# EAGLE board analog-v10 (EAGLE 7.2.0)

Size 140 x 89.87 mm. Coordinates in mm from the lower left corner, seen from the top.
Outline: 30,0 110,0 arc90 120,10 120,20 arc-90 122,22 140,22 140,28 122,28 arc-90 120,30 120,40 arc90 110,50 80,50 arc-90 75,55 75,75 arc-90 80,80 98,80 98,89.87 42,89.87 42,80 60,80 arc-90 65,75 65,55 arc-90 60,50 30,50 arc90 20,40 20,30 arc-90 18,28 0,28 0,22 18,22 arc-90 20,20 20,10 arc90 30,0
Copper layers (1*16): Top 0.035mm / dielectric 1.5mm / Bottom 0.035mm
Design rules "default": minimum track width 10mil, minimum drill 24mil, track to track 8mil, track to pad 8mil, pad to pad 8mil, via to via 8mil, smd to smd 8mil, copper to edge 40mil, drill to drill 8mil, minimum pad ring 10mil, minimum via ring 8mil, stop-mask expansion 4mil, vias tented up to drill 0mil, thermal gap 10mil
Holes 2.2 mm at 26,34 26,16 114,16 114,34

## Footprints (pad centres in the part's own frame; a part is rotated, then mirrored left to right if it is on the bottom)
1X03_LOCK = drill 1.016 pad 1.88: 1 0,0.127; 2 2.54,-0.127; 3 5.08,0.127
JST-2-PTH = drill 0.7 pad 1.448: 1 -1,0; 2 1,0
0603-CAP = smd 1.1 x 1: 1 -0.85,0; 2 0.85,0
EIA3528 = smd 1.2 x 2.5: A 1.65,0; C -1.65,0
LED-0603 = smd 1 x 1: A 0,-0.877; C 0,0.877
SOT223 = smd 1.499 x 2.007: 1 -2.261,-3.15; 2 0.025,-3.15; 3 2.311,-3.15 | smd 3.81 x 2.007: 4 0,3.15
1X06_LOCK = drill 1.016 pad 1.88: 1 0,0; 2 2.54,-0.254; 3 5.08,0; 4 7.62,-0.254; 5 10.16,0; 6 12.7,-0.254
SOT223' = smd 1.219 x 2.235: 1 -2.311,-3.099; 2 0,-3.099; 3 2.311,-3.099 | smd 3.6 x 2.2: 4 0,3.099
0603-RES = smd 1.1 x 1: 1 -0.85,0; 2 0.85,0
TACTILE-SWITCH-1101NE = smd 2.3 x 1.6: P$1 -3.15,0; P$2 3.15,0
TQFP32-08 = smd 1.27 x 0.559: 1 -4.293,2.8; 2 -4.293,2; 3 -4.293,1.2; 4 -4.293,0.4; 5 -4.293,-0.4; 6 -4.293,-1.2; 7 -4.293,-2; 8 -4.293,-2.8; 17 4.293,-2.8; 18 4.293,-2; 19 4.293,-1.2; 20 4.293,-0.4; 21 4.293,0.4; 22 4.293,1.2; 23 4.293,2; 24 4.293,2.8 | smd 0.559 x 1.27: 9 -2.8,-4.293; 10 -2,-4.293; 11 -1.2,-4.293; 12 -0.4,-4.293; 13 0.4,-4.293; 14 1.2,-4.293; 15 2,-4.293; 16 2.8,-4.293; 25 2.8,4.293; 26 2,4.293; 27 1.2,4.293; 28 0.4,4.293; 29 -0.4,4.293; 30 -1.2,4.293; 31 -2,4.293; 32 -2.8,4.293
SSOP24 = smd 0.348 x 1.397: 1 -3.575,-3.656; 2 -2.925,-3.656; 3 -2.275,-3.656; 4 -1.625,-3.656; 5 -0.975,-3.656; 6 -0.325,-3.656; 7 0.325,-3.656; 8 0.975,-3.656; 9 1.625,-3.656; 10 2.275,-3.656; 11 2.925,-3.656; 12 3.575,-3.656; 13 3.575,3.656; 14 2.925,3.656; 15 2.275,3.656; 16 1.625,3.656; 17 0.975,3.656; 18 0.325,3.656; 19 -0.325,3.656; 20 -0.975,3.656; 21 -1.625,3.656; 22 -2.275,3.656; 23 -2.925,3.656; 24 -3.575,3.656
QRE1113 = smd 1.2 x 0.6: 1 -1.8,-0.9; 2 1.8,-0.9; 3 1.8,0.9; 4 -1.8,0.9
RESONATOR-SMD = smd 0.45 x 1.905: 1 -1.2,0; 2 0,0; 3 1.2,0

## Placement (x,y rotation side)
9VREG  [1X03_LOCK]  35.24,45.72 270 top
BAT  M02JST-PTH-2  [JST-2-PTH]  84.77,41.91 0 bottom
C1  0.1uF  [0603-CAP]  80.96,20.32 270 top
C2  0.1uF  [0603-CAP]  69.53,66.04 0 bottom
C3  0.1uF  [0603-CAP]  106.36,44.45 0 top
C4  0.1uF  [0603-CAP]  64.45,10.16 90 top
C5  0.1uF  [0603-CAP]  64.45,6.35 90 top
C6  10uF  [EIA3528]  77.15,8.89 90 top
C8  0.1uF  [0603-CAP]  106.36,46.99 0 top
C9  0.1uF  [0603-CAP]  69.53,73.66 0 bottom
C10  1.0uF  [0603-CAP]  69.53,71.12 0 bottom
C11  47uF  [EIA3528]  102.55,45.72 90 top
C12  47uF  [EIA3528]  96.2,36.83 0 top
D1  STATE  [LED-0603]  100.01,5.08 90 top
IC1  REG1117  [SOT223]  96.2,44.45 0 top
JP1  ENC2  [1X06_LOCK]  87.31,19.05 90 top
JP2  ENC1  [1X06_LOCK]  54.29,19.05 90 top
JP3  FTDI  [1X06_LOCK]  45.4,3.81 180 top
Q1  LED ON  [SOT223']  69.53,58.42 0 bottom
R1  10K  [0603-RES]  69.53,68.58 0 bottom
R2  330  [0603-RES]  100.01,7.62 0 top
R3  47K  [0603-RES]  94.93,87.63 180 bottom
R4  10K  [0603-RES]  100.01,10.16 0 top
R5  47K  [0603-RES]  11.11,24.13 0 bottom
R6  47K  [0603-RES]  129.22,24.13 0 bottom
R7  47K  [0603-RES]  84.77,87.63 0 bottom
R8  47K  [0603-RES]  74.61,87.63 180 bottom
R9  47K  [0603-RES]  64.45,87.63 180 bottom
R10  47K  [0603-RES]  55.56,87.63 180 bottom
R11  47K  [0603-RES]  45.4,87.63 180 bottom
R12  47K  [0603-RES]  69.53,76.2 0 bottom
R13  47  [0603-RES]  49.21,82.55 180 bottom
R14  47  [0603-RES]  69.53,82.55 180 bottom
R15  47  [0603-RES]  89.85,82.55 180 bottom
R16  120  [0603-RES]  11.11,26.67 0 bottom
R17  120  [0603-RES]  129.22,26.67 0 bottom
R18  100  [0603-RES]  69.53,80.01 180 bottom
S1  RESET  [TACTILE-SWITCH-1101NE]  54.29,3.81 0 top
S3  INPUT  [TACTILE-SWITCH-1101NE]  89.85,3.81 180 top
U1  ATMEGA328P  [TQFP32-08]  70.8,25.4 0 top
U2  TB6612FNG  [SSOP24]  70.8,8.89 0 top
U3  QRE1113  [QRE1113]  55.56,85.09 0 bottom
U4  QRE1113  [QRE1113]  64.45,85.09 0 bottom
U5  QRE1113  [QRE1113]  74.61,85.09 0 bottom
U6  QRE1113  [QRE1113]  84.77,85.09 0 bottom
U7  QRE1113  [QRE1113]  94.93,85.09 0 bottom
U8  QRE1113  [QRE1113]  6.03,25.4 180 bottom
U9  QRE1113  [QRE1113]  134.3,25.4 0 bottom
U10  QRE1113  [QRE1113]  45.4,85.09 0 bottom
Y1  20MHZ  [RESONATOR-SMD]  80.96,27.94 90 top

## Library data of the parts
9VREG JP1-JP3 = SparkFun-Connectors
BAT = SparkFun-Connectors; SKU: PRT-09914
C1-C5 C8 C9 = SparkFun-Capacitors; PROD_ID: CAP-00810
C6 = SparkFun-Capacitors; PROD_ID: CAP-08063
C10 = SparkFun-Capacitors; PROD_ID: CAP-00868
C11 C12 = SparkFun-Capacitors; PROD_ID: CAP-08310
D1 = SparkFun-LED; PROD_ID: DIO-00821
IC1 = burr-brown; MPN: REG1117; OC_FARNELL: 1097566; OC_NEWARK: 14P6981
Q1 = transistor-power
R1 R4 = SparkFun-Resistors; PROD_ID: RES-00824
R2 = SparkFun-Resistors; PROD_ID: RES-00818
R3 R5-R12 = SparkFun-Resistors; PROD_ID: RES-07871
R13-R17 = SparkFun-Resistors
R18 = SparkFun-Resistors; PROD_ID: RES-07863
S1 S3 = SparkFun-Electromechanical
U1 = SparkFun-DigitalIC; PROD_ID: IC-09069
U2 = SparkFun-PowerIC; PROD_ID: IC-09363
U3-U10 = SparkFun-Sensors; PROD_ID: IC-09357
Y1 = SparkFun-FreqCtrl; PROD_ID: XTAL-08900

## Nets
3.3V: C3.1 C4.1 S3.P$2 U2.20
5V: C8.2 C9.1 C10.1 C12.A IC1.2 JP1.4 JP2.4 JP3.4 R1.1 R3.2 R5.2 R6.2 R7.2 R8.2 R9.2 R10.2 R11.2 R12.2 R16.1 R17.1 U1.4 U1.6 U1.18 U3.1 U5.1 U7.1
9V: C5.1 C6.A C11.A IC1.3 U2.13 U2.14 U2.24
AIN1: U1.11 U2.21
AIN2: U1.10 U2.22
AREF: C1.1 U1.20
BIN1: U1.13 U2.17
BIN2: U1.14 U2.16
BTN1: R4.1 S3.P$1 U1.32
DTR: C2.1 JP3.1
ENC1: JP2.2 U1.2
ENC2: JP1.2 U1.17
GND: 9VREG.2 BAT.1 C3.2 C4.2 C5.2 C6.C C8.1 C9.2 C10.2 C11.C C12.C D1.C IC1.1 JP1.1 JP2.1 JP3.5 JP3.6 Q1.3 R4.2 S1.P$1 U1.3 U1.5 U1.21 U2.3 U2.4 U2.9 U2.10 U2.18 U3.4 U4.4 U5.4 U6.4 U7.4 U8.2 U8.4 U9.2 U9.4 U10.4 Y1.2
LED1: R2.2 U1.1
LEDON: Q1.1 R12.1
MA1: JP2.5 U2.1 U2.2
MA2: JP2.6 U2.5 U2.6
MB1: JP1.5 U2.11 U2.12
MB2: JP1.6 U2.7 U2.8
N$1: D1.A R2.1
N$2: R13.2 U3.2
N$3: R13.1 U10.1
N$4: R14.2 U5.2
N$5: R14.1 U4.1
N$6: R15.2 U7.2
N$7: R15.1 U6.1
N$8: R17.2 U9.1
N$9: R16.2 U8.1
N$10: R18.2 U4.2 U6.2 U10.2
N$11: Q1.4 R18.1
N-C: JP1.3
N/C: JP2.3
PWMA: U1.9 U2.23
PWMB: U1.15 U2.15
RAW: 9VREG.1
RESET: C2.2 R1.2 S1.P$2 U1.29
RX: JP3.3 U1.30
S1: R11.1 U1.23 U10.3
S2: R10.1 U1.24 U3.3
S3: R9.1 U1.25 U4.3
S4: R8.1 U1.26 U5.3
S5: R7.1 U1.27 U6.3
S6: R3.1 U1.28 U7.3
S7: R5.1 U1.19 U8.3
S8: R6.1 U1.22 U9.3
STBY: U1.12 U2.19
TX: JP3.2 U1.31
V_BATT: BAT.2
VCC: 9VREG.3
XTAL1: U1.7 Y1.1
XTAL2: U1.8 Y1.3

## Tracks (layer width: path | path; a pad name or v marks a point on that pad's centre or on a via)
3.3V  (3 unrouted)
5V  (25 unrouted)
9V  (6 unrouted)
AIN1  (1 unrouted)
AIN2  (1 unrouted)
AREF  (1 unrouted)
BIN1  (1 unrouted)
BIN2  (1 unrouted)
BTN1  (2 unrouted)
DTR  (1 unrouted)
ENC1  (1 unrouted)
ENC2  (1 unrouted)
GND  (38 unrouted)
LED1  (1 unrouted)
LEDON  (1 unrouted)
MA1  (2 unrouted)
MA2  (2 unrouted)
MB1  (2 unrouted)
MB2  (2 unrouted)
N$1  (1 unrouted)
N$2  (1 unrouted)
N$3  (1 unrouted)
N$4  (1 unrouted)
N$5  (1 unrouted)
N$6  (1 unrouted)
N$7  (1 unrouted)
N$8  (1 unrouted)
N$9  (1 unrouted)
N$10  (3 unrouted)
N$11  (1 unrouted)
PWMA  (1 unrouted)
PWMB  (1 unrouted)
RESET  (3 unrouted)
RX  (1 unrouted)
S1  (2 unrouted)
S2  (2 unrouted)
S3  (2 unrouted)
S4  (2 unrouted)
S5  (2 unrouted)
S6  (2 unrouted)
S7  (2 unrouted)
S8  (2 unrouted)
STBY  (1 unrouted)
TX  (1 unrouted)
XTAL1  (1 unrouted)
XTAL2  (1 unrouted)